# Altium PCB 04-11376.PcbDoc (part 2 of 3)
Units mm, origin at the board's own origin, x right, y up, seen from the top; angles counter-clockwise.
Board outline 23 x 31.8 mm, 4 copper layers (Top Layer, GND, Power, Bottom Layer), stack 1.312 mm thick; 75 components, 46 nets, 201 pads, 132 vias.
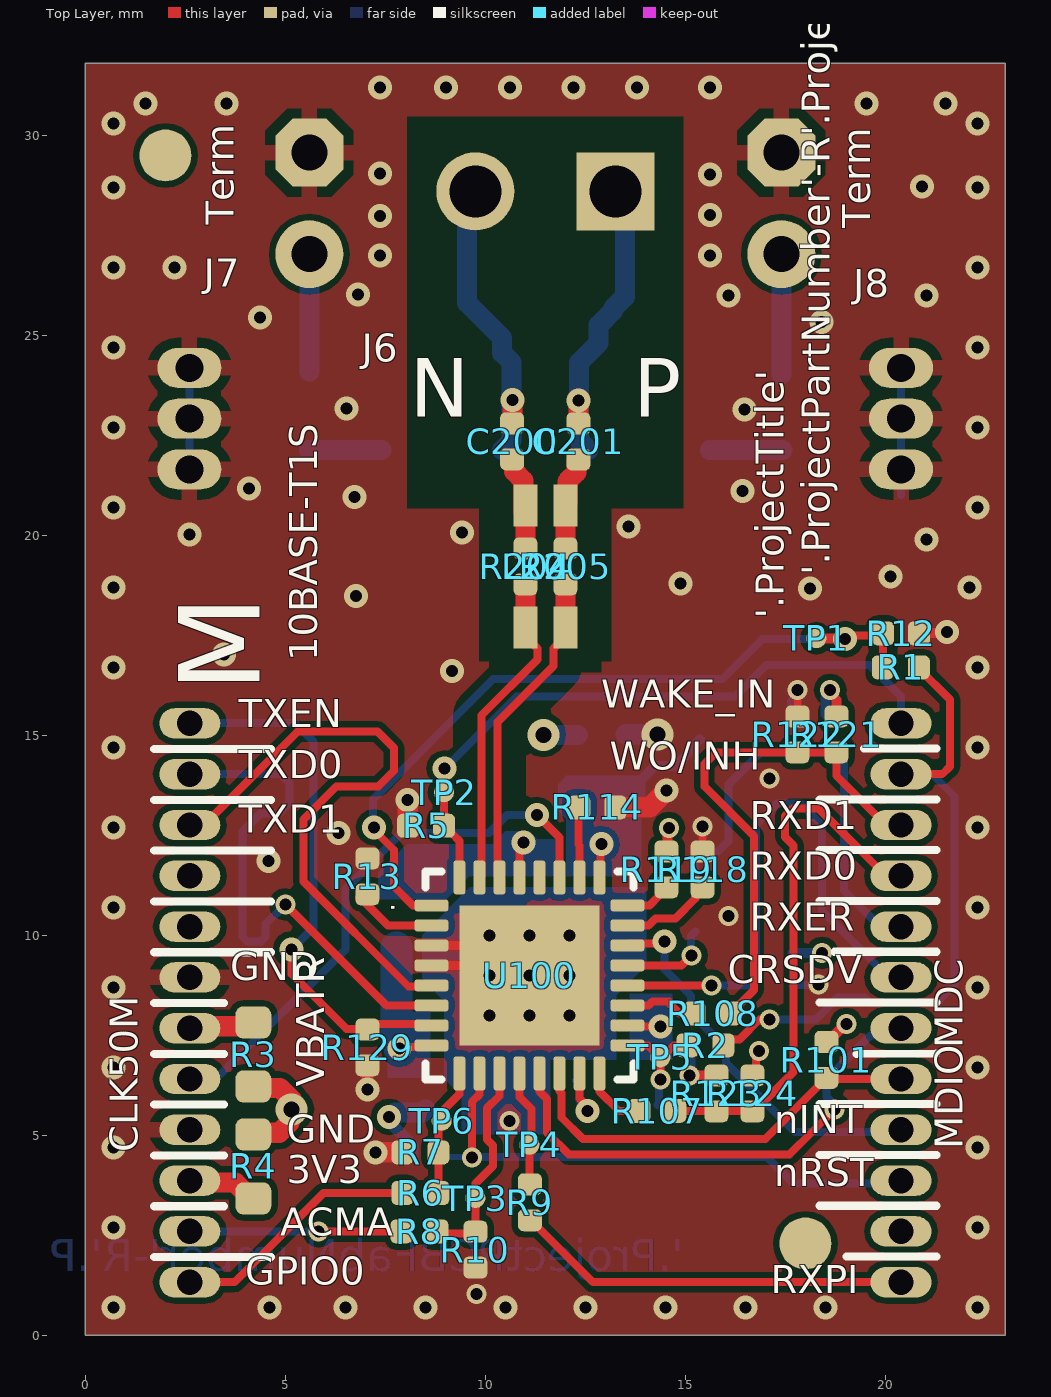
[diagram p0: Top Layer view]

## Via types
v1: diameter 0.6, hole 0.3, Top Layer to Bottom Layer, tented both sides, 98 vias
v2: diameter 0.5, hole 0.3, Top Layer to Bottom Layer, tented both sides, 30 vias
v3: diameter 0.8, hole 0.4, Top Layer to Bottom Layer, tented both sides, 3 vias
v4: diameter 0.6, hole 0.3, Top Layer to Bottom Layer, tented top, 1 vias

## Nets (pads, with @x,y where several pads share a name; then routed paths per layer and width w, separated by ;. In a path a pad name is that pad's centre, name@x,y a point inside that pad or via, vN(x,y) a via of type N, cw(c..) or ccw(c..) an arc to the next point about the centre after c; other vN are vias at no path point) (continued)
MDC: (continued)
  Top Layer w0.2: U100.13@11.35,6.55 11.35,6.1 11.537,5.913 11.537,5.068 12.087,4.519 17.598,4.519 18.172,5.092 v2(18.729,5.65)
  Bottom Layer w0.2: v2(18.729,5.65) 18.729,5.758 18.525,5.963 R100.1@18.525,6.44 18.55,6.44 18.741,6.631 18.741,6.614 19.188,7.061 19.192,7.061 19.629,7.497 19.674,7.497 19.857,7.68 J4.7@20.39,7.68
MDIO: J4.8 R101.1 U100.14 | length 10.3
  Top Layer w0.2: U100.14@11.85,6.55 11.85,6.113 11.897,6.066 11.897,5.453 12.438,4.912 16.997,4.912 18.325,6.24 18.325,6.245 18.52,6.44 R101.1@18.525,6.44 ; R101.1@18.707,6.41 J4.8@20.39,6.41
  Bottom Layer w0.2: J4.8@20.385,6.405 J4.8@20.39,6.41
Mode0: R118.1 U100.23 | length 2.3
  Top Layer w0.2: U100.23@13.55,10.25 14.075,10.25 14.25,10.425 14.751,10.425 15.253,10.927 15.253,11.028 15.425,11.2 R118.1@15.43,11.2
Mode1: R119.1 U100.24 | length 1.2
  Top Layer w0.2: U100.24@13.55,10.75 14.1,10.75 14.348,10.998 14.348,11.028 14.52,11.2 R119.1@14.525,11.2
NetC200_1: C200.1 L200.4 R204.2 | length 2.5
  Top Layer w0.5: C200.1@10.668,21.902 10.693,21.902 10.718,21.877 10.718,21.601 10.95,21.369 10.95,20.58 L200.4@11,20.53 ; R204.2@11,19.725 L200.4@11,20.75
NetC201_1: C201.1 L200.3 R205.2 | length 2.3
  Top Layer w0.5: R205.2@12,19.7 12,20.777 12.05,20.827 12.05,21.352 12.275,21.577 12.275,21.873 12.3,21.898 C201.1@12.325,21.898
NetC202_1: C202.1 J7.2 | length 2.9
  Bottom Layer w0.5: C202.1@5.6,24.1 J7.2@5.6,27.03
NetC202_2: C202.2 R200.1 | length 1.8
  Bottom Layer w0.5: C202.2@5.59,22.135 R200.1@7.4,22.135
NetC203_1: C203.1 J8.2 | length 3
  Bottom Layer w0.5: C203.1@17.4,24.026 J8.2@17.4,27.03
NetC203_2: C203.2 R201.1 | length 1.8
  Bottom Layer w0.5: R201.1@15.613,22.135 C203.2@17.423,22.135
NetR6_2: R6.2 R7.2 TP6.1 U100.9 | length 3.1
  Top Layer w0.2: R6.2@8.826,3.561 R7.2@8.826,4.576 TP6.1@8.826,5.286 ; TP6.1@8.905,5.365 8.962,5.422 8.962,5.651 9.35,6.039 U100.9@9.35,6.55
NetR8_2: R8.2 R10.2 TP3.1 U100.11 | length 5.4
  Top Layer w0.2: R8.2@8.8,2.6 8.848,2.552 9.803,2.552 9.75,2.605 9.75,3.801 10.187,4.238 10.187,4.751 10.043,4.895 10.043,5.682 10.35,5.989 U100.11@10.35,6.55 U100.11@10.35,6.576
NetR9_2: R9.2 TP4.1 U100.12 | length 3.1
  Top Layer w0.2: U100.12@10.85,6.55 10.85,5.958 11.15,5.657 TP4.1@11.15,4.58 ; TP4.1@11.1,4.765 11.107,4.759 11.107,3.785 R9.2@11.113,3.779
NetR13_2: R13.2 U100.2 | length 2.1
  Top Layer w0.2: R13.2@6.843,10.945 6.868,10.945 7.562,10.25 U100.2@8.65,10.25
NetR107_2: R107.2 U100.16 | length 1.7
  Top Layer w0.2: U100.16@12.85,6.55 12.85,6.1 13.335,5.615 R107.2@13.85,5.615
NetR108_2: R108.2 U100.19 | length 1.9
  Top Layer w0.2: U100.19@13.55,8.25 14.075,8.25 14.175,8.35 14.6,8.35 14.6,8.301 14.85,8.05 R108.2@15.231,8.05
NetR109_2: R109.2 U100.21 | length 2.4
  Top Layer w0.2: U100.21@13.55,9.25 14.906,9.25 v2(15.156,9.5)
  Bottom Layer w0.2: v2(15.156,9.5) 15.14,9.517 15.14,9.99 R109.2@15.25,10.1